# Altium PCB 04-12307_Drone_ESC.PcbDoc (part 4 of 5)
Units mm, origin at the board's own origin, x right, y up, seen from the top; angles counter-clockwise.
Board outline 55 x 33 mm, 4 copper layers (LAYER 1 (Top), LAYER 2, LAYER 3, LAYER 4 (Bottom)), stack 1.504 mm thick; 174 components, 90 nets, 407 pads, 193 vias.
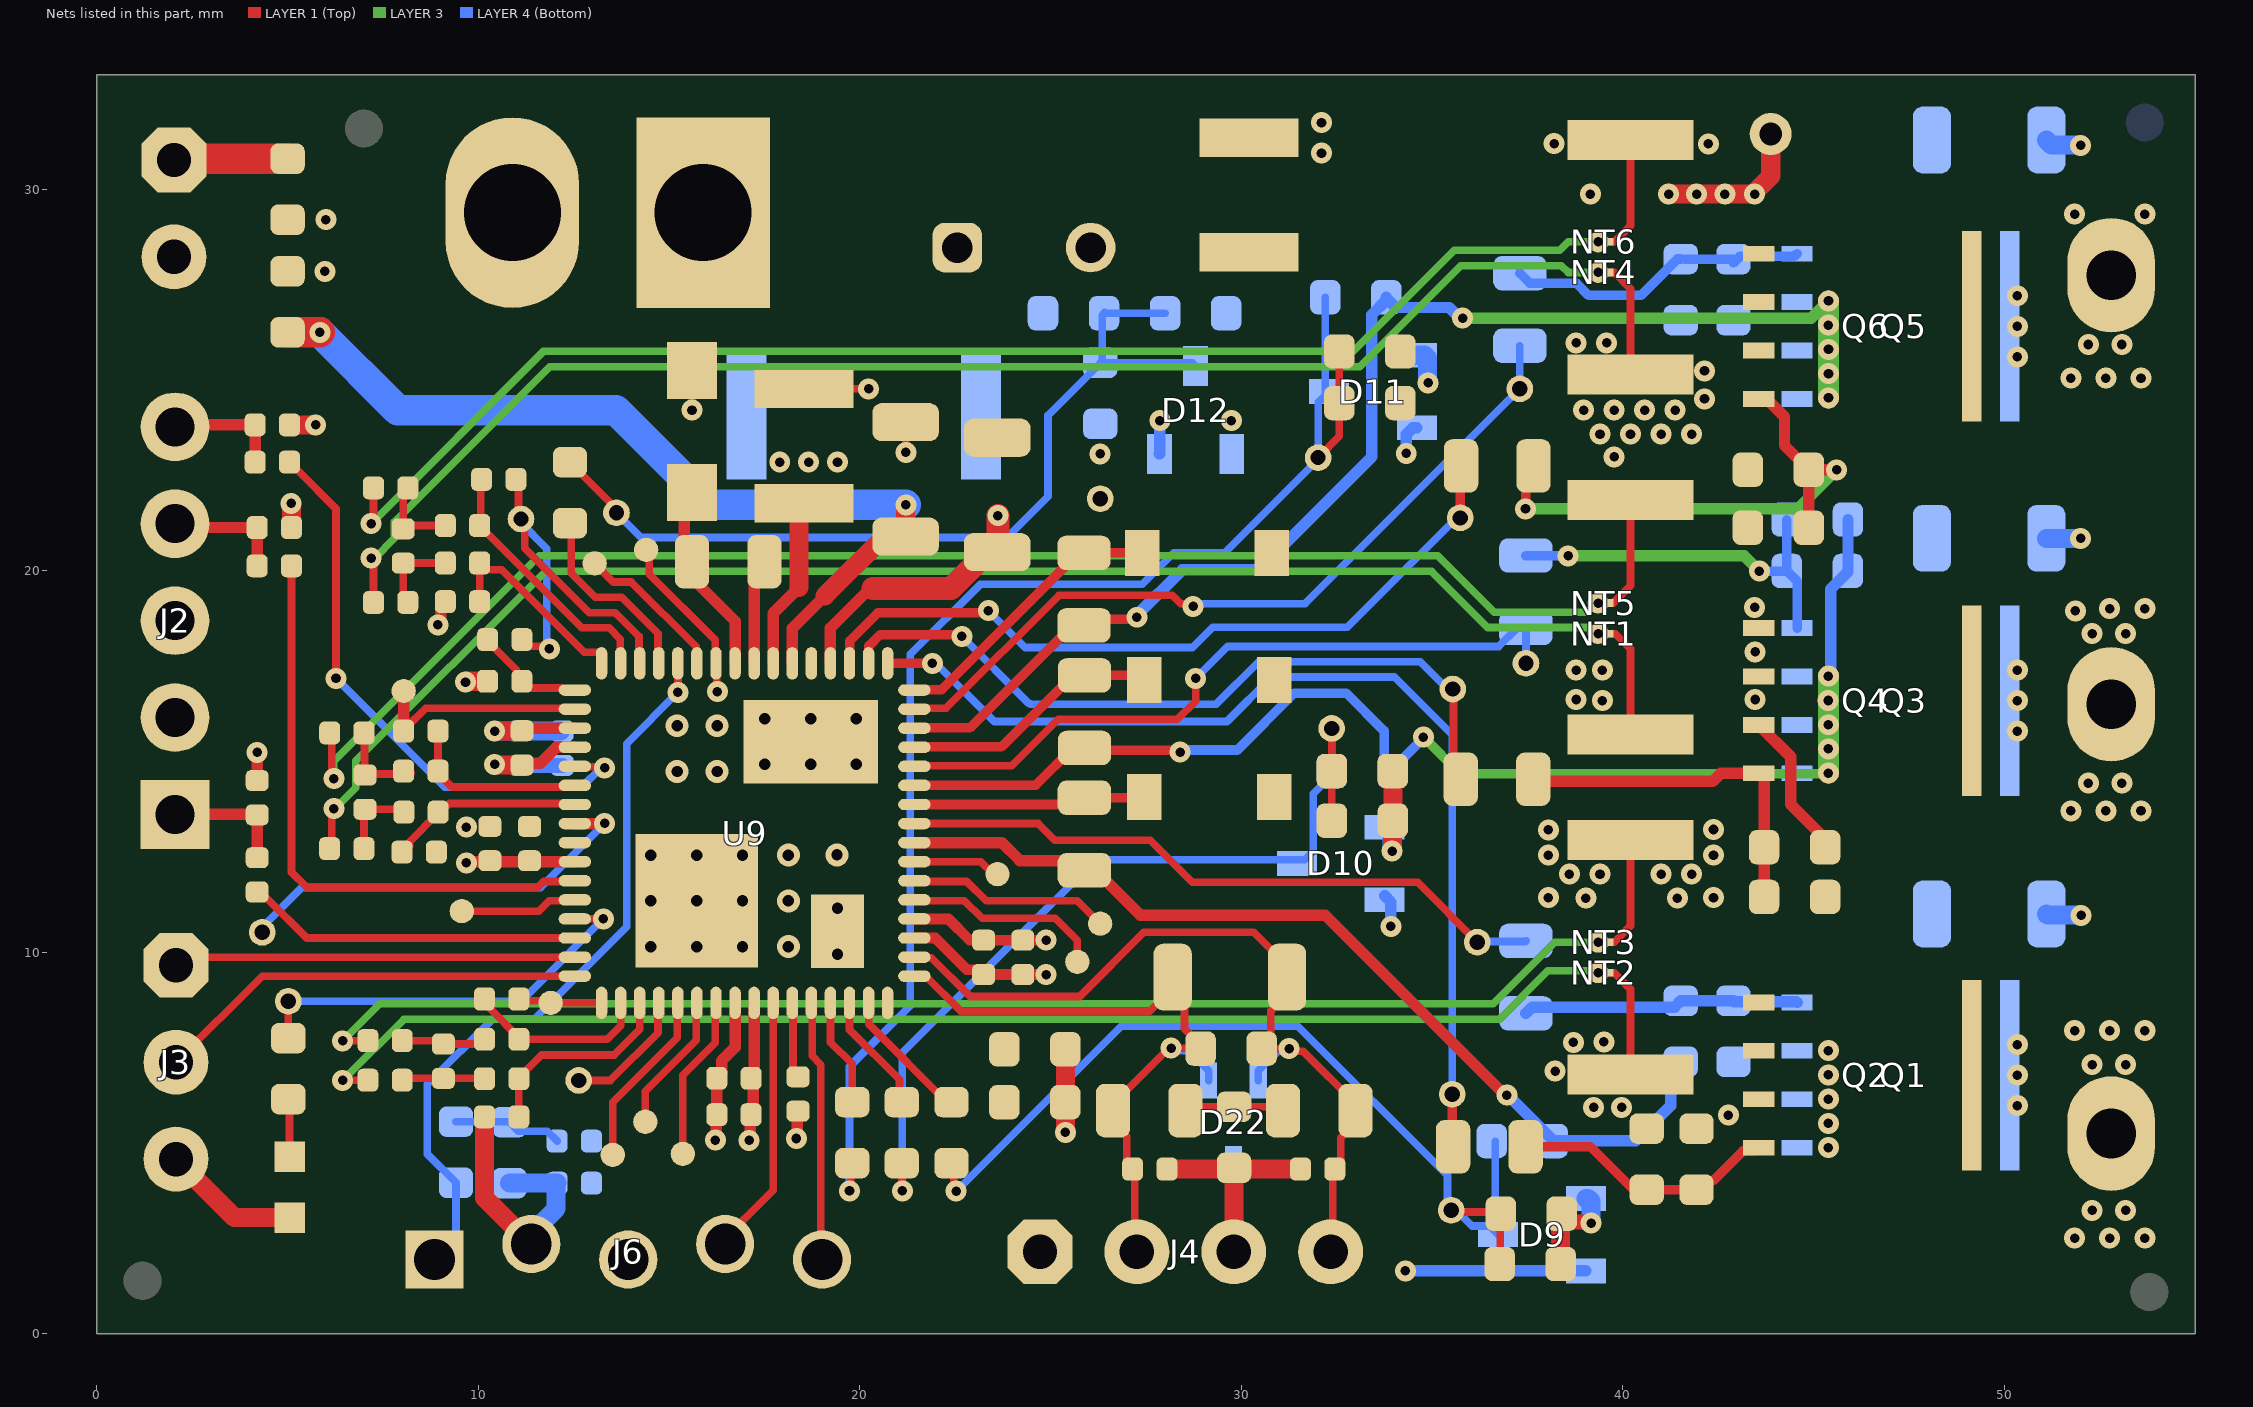
[diagram p4: the nets of this part, all layers, seen from the top]

## Via types
v1: diameter 0.55, hole 0.25, LAYER 1 (Top) to LAYER 4 (Bottom), tented both sides, 168 vias
v2: diameter 0.6, hole 0.3, LAYER 1 (Top) to LAYER 4 (Bottom), tented bottom, 25 vias

## Nets (pads, with @x,y where several pads share a name; then routed paths per layer and width w, separated by ;. In a path a pad name is that pad's centre, name@x,y a point inside that pad or via, vN(x,y) a via of type N, cw(c..) or ccw(c..) an arc to the next point about the centre after c; other vN are vias at no path point) (continued)
M\C\L\R\: (continued)
  LAYER 4 (Bottom) w0.2: J6.1@8.849,1.934 9.415,2.5 R183.2@9.415,3.956 ; R183.2@9.415,3.96 9.415,3.964 8.665,4.714 8.665,6.544 10.371,8.25 11.468,8.25 13.885,10.668 13.885,15.465 v1(15.231,16.812)
NetC1_1: C1.1 R2.2 U9.17 | length 3
  LAYER 1 (Top) w0.2: R2.2@10.241,18.198 10.241,18.152 10.99,17.404 10.99,17.257 C1.1@11.141,17.105 11.141,17.101 11.314,16.929 12.173,16.929 12.226,16.875 U9.17@12.528,16.875
NetC4_2: C4.2 J2.1 R11.1 | length 3.3
  LAYER 1 (Top) w0.3: J2.1@2.049,13.615 4.189,13.615 C4.2@4.203,13.602 R11.1@4.203,12.48
NetC5_2: C5.2 J2.4 R12.1 | length 3.2
  LAYER 1 (Top) w0.3: J2.4@2.049,21.235 2.149,21.135 C5.2@4.203,21.135 R12.1@4.202,20.131
NetC6_2: C6.2 J2.5 R1.1 | length 3.1
  LAYER 1 (Top) w0.3: J2.5@2.049,23.775 2.1,23.826 C6.2@4.15,23.826 R1.1@4.15,22.85
NetC46_1: C46.1 R58.2 R59.1 | length 2.2
  LAYER 1 (Top) w0.2: R58.2@8.15,19.172 8.031,19.291 C46.1@8.031,20.201 8.035,20.205 R59.1@9.134,20.205
NetC46_2: C46.2 R21.2 R22.1 | length 2.3
  LAYER 1 (Top) w0.2: R21.2@8.15,22.174 8.031,22.055 C46.2@8.031,21.101 8.118,21.188 R22.1@9.134,21.188
NetC51_1: C51.1 U9.8 | length 2.7
  LAYER 1 (Top) w0.3: U9.8@17.229,17.575 17.229,20.165 C51.1@17.301,20.237
NetC51_2: C51.2 D24.2 U9.9 | length 5.1
  LAYER 1 (Top) w0.3: D24.2@15.6,22.05 15.401,21.851 15.401,20.01 16.729,18.682 U9.9@16.729,17.575
NetC55_1: C55.1 R74.2 R75.1 | length 2.2
  LAYER 1 (Top) w0.2: R74.2@8.005,6.649 8.052,6.697 C55.1@9.083,6.697 10.151,6.697 R75.1@10.162,6.685
NetC55_2: C55.2 R67.2 R68.1 | length 2.2
  LAYER 1 (Top) w0.2: R67.2@8.005,7.686 8.993,7.686 C55.2@9.083,7.597 10.036,7.597 R68.1@10.162,7.723
NetC65_1: C65.1 R91.2 R92.1 | length 2.1
  LAYER 1 (Top) w0.2: R91.2@7.001,12.719 7.001,13.721 C65.1@7.029,13.75 7.974,13.75 R92.1@8.048,13.675
NetC65_2: C65.2 R83.2 R84.1 | length 2.1
  LAYER 1 (Top) w0.2: R83.2@7.004,15.752 7.016,15.739 7.016,14.662 C65.2@7.029,14.65 ; C65.2@7.254,14.675 8.216,14.675 R84.1@8.241,14.7
NetC70_2: C70.2 R99.1 R100.1 | length 2.6
  LAYER 1 (Top) w0.2: R99.1@28.537,5.85 28.638,5.951 C70.2@29.81,5.951 30.991,5.951 R100.1@31.092,5.85
NetC75_2: C75.2 D9.3 R110.2 R114.1 R119.1 VA.1 | length 24.6
  LAYER 1 (Top) w0.2: R114.1@22.4,4.475 22.463,4.413 22.463,3.801 v1(22.526,3.738) ; VA.1@35.5,3.238 35.544,3.194 36.756,3.194 R119.1@36.8,3.15 36.785,3.135 36.785,1.846 C75.2@36.769,1.831
  LAYER 4 (Bottom) w0.2: v1(22.526,3.738) 26.854,8.066 31.477,8.066 35.404,4.139 35.404,3.333 VA.1@35.5,3.238 35.635,3.238 36.048,2.825 36.506,2.825 D9.3@36.659,2.672 ; R110.2@36.659,5.052 D9.3@36.659,2.672 ; D9.3@36.731,2.6 D9.3@36.659,2.672
NetC76_2: C76.2 D11.3 R111.2 R115.1 R120.1 VC.1 | length 35.6
  LAYER 1 (Top) w0.2: v1(19.729,3.75) 19.764,3.786 19.764,4.44 R115.1@19.8,4.475 ; VC.1@32.012,22.967 32.569,23.525 C76.2@32.569,24.396 R120.1@32.569,25.75
  LAYER 4 (Bottom) w0.2: v1(19.729,3.75) 19.729,7.007 21.325,8.604 21.325,17.813 23.162,19.65 27.404,19.65 28.226,20.472 29.562,20.472 VC.1@32.012,22.922 ; VC.1@32.012,22.967 32.012,24.412 32.2,24.6 R111.2@32.2,27.171
NetC78_2: C78.2 D10.3 R112.2 R118.1 R121.1 VB.1 | length 22.8
  LAYER 1 (Top) w0.2: R118.1@21.1,4.475 21.1,3.76 v1(21.113,3.747) ; VB.1@32.366,15.668 32.369,15.664 R121.1@32.369,14.75 C78.2@32.369,13.45
  LAYER 4 (Bottom) w0.2: v1(21.113,3.747) 21.113,7.362 23.68,9.93 26.181,12.43 31.656,12.43 31.881,12.655 31.881,14.158 32.369,14.646 R112.2@32.369,14.75 ; VB.1@32.366,15.668 32.367,15.666 32.367,14.952 R112.2@32.566,14.754
NetC85_2: C85.2 D12.3 R128.2 R133.1 R137.1 VBUS.1 | length 23.4
  LAYER 1 (Top) w0.2: R133.1@12.4,22.85 12.4,22.846 13.619,21.627 VBUS.1@13.619,21.52
  LAYER 4 (Bottom) w0.2: VBUS.1@13.619,21.52 14.267,20.872 23.854,20.872 24.933,21.951 24.933,24.079 26.3,25.446 C85.2@26.3,25.45 ; R128.2@26.4,26.75 26.35,26.7 26.35,25.5 C85.2@26.3,25.45 ; R128.2@26.42,26.77 26.44,26.75 R137.1@28,26.75 ; D12.3@28.8,25.363 28.713,25.45 C85.2@26.3,25.45
NetC108_1: C108.1 NT1.2 Q4.1 Q4.2 Q4.3 R157.2 Rsh2.2 | length 6.9
  LAYER 1 (Top) w0.2: NT1.2@39.65,18.355 39.801,18.355 40.2,17.956 Rsh2.2@40.2,15.71
  LAYER 1 (Top) w0.3: Q4.3@43.564,15.96 44.4,15.124 44.4,13.875 45.3,12.975 C108.1@45.3,12.753
  other v1: 39.464,16.595 38.774,16.627 43.464,16.627 38.774,17.395 39.464,17.395 43.464,17.877 43.455,19.044
NetC109_1: C109.1 NT3.2 NT4.2 NT5.2 Q6.1 Q6.2 Q6.3 R159.2 Rsh1.1 Rsh2.1 Rsh3.2 | length 8.9
  LAYER 1 (Top) w0.2: NT3.2@39.65,10.267 39.771,10.267 40.2,10.696 Rsh1.1@40.2,12.942 ; NT5.2@39.65,19.154 39.741,19.154 40.2,19.614 Rsh2.1@40.2,21.86 ; NT4.2@39.65,27.821 39.771,27.821 40.2,27.392 Rsh3.2@40.2,25.146
  other v1: 38.048,11.432 39.031,11.421 41.431,11.421 42.375,11.432 38.6,12.049 39.4,12.049 41,12.049 41.8,12.049 38.048,12.545 42.375,12.545 38.044,13.207 42.375,13.219 39.769,22.987 39.4,23.585 40.2,23.585 41,23.585 41.8,23.585 38.969,24.213 39.769,24.213 40.569,24.213 41.369,24.213 42.139,24.505 42.139,25.239 38.774,25.972 39.571,25.975
NetC110_1: C110.1 NT2.2 Q2.1 Q2.2 Q2.3 R158.2 Rsh1.2 | length 3
  LAYER 1 (Top) w0.2: NT2.2@39.65,9.467 39.771,9.467 40.2,9.038 Rsh1.2@40.2,6.792
  other v1: 42.764,5.734 39.235,5.938 39.969,5.938 38.222,6.888 38.705,7.64 39.5,7.651
NetC111_2: C111.2 D17.2 U9.64 | length 7.5
  LAYER 1 (Top) w0.25: U9.64@21.429,16.875 21.438,16.885 22.146,16.885 25.361,20.1 25.361,20.152 25.679,20.469 D17.2@27.4,20.469
NetC112_2: C112.2 D15.2 U9.58 | length 7.1
  LAYER 1 (Top) w0.25: U9.58@21.429,13.875 25.708,13.875 C112.2@25.885,14.052 27.133,14.052 27.137,14.055 D15.2@27.137,14.089 ; D15.2@27.441,13.785 D15.2@27.288,13.939 ; D15.2@27.137,14.089 D15.2@27.458,13.768 ; D15.2@27.137,14.089 D15.2@27.288,13.939 ; D15.2@27.288,13.939 D15.2@27.458,13.768 ; D15.2@27.458,13.768 27.458,13.672 D15.2@27.458,13.768
NetC113_2: C113.2 D16.2 U9.61 | length 6.9
  LAYER 1 (Top) w0.25: U9.61@21.429,15.375 21.438,15.385 23.71,15.385 25.584,17.259 27.386,17.259 D16.2@27.499,17.146
NetC118_2: C118.2 R181.2 R183.1 | length 2.9
  LAYER 4 (Bottom) w0.2: R183.1@9.415,5.56 9.421,5.554 10.807,5.554 11.051,5.31 11.809,5.31 12.065,5.055 C118.2@12.065,5.05
NetHSA_1: HSA.1 R161.1 U9.57 | length 17.3
  LAYER 1 (Top) w0.2: U9.57@21.429,13.375 24.675,13.375 25.108,12.942 27.606,12.942 28.715,11.833 34.619,11.833 HSA.1@36.184,10.267
  LAYER 4 (Bottom) w0.2: HSA.1@36.184,10.267 36.201,10.284 37.443,10.284 R161.1@37.459,10.3
NetHSB_1: HSB.1 R160.1 U9.60 | length 18.8
  LAYER 1 (Top) w0.2: U9.60@21.429,14.875 21.448,14.894 23.982,14.894 25.196,16.109 28.322,16.109 28.8,16.587 v1(28.8,17.179)
  LAYER 4 (Bottom) w0.2: v1(28.8,17.179) 29.639,18.018 36.742,18.018 37.224,18.5 R160.1@37.459,18.5 HSB.1@37.459,17.575
NetHSC_1: HSC.1 R171.1 U9.63 | length 20.7
  LAYER 1 (Top) w0.2: U9.63@21.429,16.375 21.448,16.394 22.257,16.394 25.22,19.358 28.192,19.358 28.414,19.136 28.666,19.136 v1(28.733,19.069)
  LAYER 4 (Bottom) w0.2: v1(28.733,19.069) 28.8,19.136 31.666,19.136 HSC.1@37.3,24.77 R171.1@37.3,25.9
NetLD1_1: LD1.1 R187.2 | length 1.5
  LAYER 1 (Top) w0.2: R187.2@5.019,6.15 5.05,6.119 LD1.1@5.05,4.647
NetLSA_1: LSA.1 R168.1 U9.1 | length 27.3
  LAYER 1 (Top) w0.25: U9.1@20.729,17.575 v1(21.9,17.575) ; LSA.1@35.525,6.28 35.525,4.929 R168.1@35.55,4.904
  LAYER 4 (Bottom) w0.2: v1(21.9,17.575) 21.995,17.575 23.52,16.05 29.623,16.05 30.791,17.218 34.007,17.218 35.525,15.7 LSA.1@35.525,6.28
NetLSB_1: LSB.1 R167.1 U9.2 | length 19.7
  LAYER 1 (Top) w0.2: LSB.1@35.544,16.9 35.559,16.885 35.559,14.546 R167.1@35.55,14.537
  LAYER 1 (Top) w0.25: U9.2@20.229,17.575 20.238,17.585 20.238,18.031 20.532,18.325 22.627,18.325 v1(22.673,18.279)
  LAYER 4 (Bottom) w0.2: v1(22.673,18.279) 24.394,16.558 ccw(c24.535,16.7) 24.415,16.54 ccw(c24.535,16.7) 24.535,16.5 29.335,16.5 30.453,17.618 34.691,17.618 35.395,16.914 LSB.1@35.53,16.914
NetLSC_1: LSC.1 R173.1 U9.3 | length 20
  LAYER 1 (Top) w0.25: U9.3@19.729,17.575 19.738,17.585 19.738,18.168 20.468,18.898 23.31,18.898 v1(23.368,18.955) ; LSC.1@35.737,21.481 35.737,22.728 R173.1@35.759,22.75
  LAYER 4 (Bottom) w0.2: v1(23.368,18.955) 24.334,17.989 28.715,17.989 29.245,18.519 32.775,18.519 LSC.1@35.737,21.481
NetRSVD1_1: RSVD1.1 U9.39 | length 4.3
  LAYER 1 (Top) w0.2: RSVD1.1@15.359,4.718 15.359,6.778 16.209,7.628 16.209,8.656 U9.39@16.229,8.675
NetRSVD2_1: RSVD2.1 U9.38 | length 3.7
  LAYER 1 (Top) w0.2: RSVD2.1@14.376,5.559 14.376,6.361 15.709,7.694 15.709,8.656 U9.38@15.729,8.675
NetTP12_1: TP12.1 U9.10 | length 4.5
  LAYER 1 (Top) w0.2: TP12.1@14.4,20.55 14.483,20.467 14.483,19.912 16.209,18.186 16.209,17.594 16.246,17.557 16.246,16.853 v1(16.264,16.835)
NetTP13_1: TP13.1 U9.53 | length 5.3
  LAYER 1 (Top) w0.2: U9.53@21.429,11.375 21.448,11.356 22.74,11.356 23.203,10.892 25.119,10.892 25.7,10.311 TP13.1@25.7,9.75
NetTP14_1: TP14.1 U9.54 | length 5.3
  LAYER 1 (Top) w0.2: U9.54@21.429,11.875 21.448,11.856 22.805,11.856 23.311,11.35 25.7,11.35 TP14.1@26.3,10.75
NetTP19_1: TP19.1 U9.11 | length 4
  LAYER 1 (Top) w0.2: TP19.1@13.049,20.197 13.541,19.705 14.01,19.705 15.709,18.006 15.709,17.594 U9.11@15.729,17.575
NetU9_55: U9.55 WAKE.1 | length 2.3
  LAYER 1 (Top) w0.2: U9.55@21.429,12.375 23.164,12.375 23.49,12.049 WAKE.1@23.608,12.049
OA1IN+: R59.2 R60.1 U9.16 | length 5.4
  LAYER 1 (Top) w0.2: R60.1@10.034,19.194 R59.2@10.034,20.205 10.034,20.2 10.206,20.028 10.615,20.028 12.774,17.869 13.182,17.869 13.229,17.823 U9.16@13.229,17.575
OA1IN-: R22.2 R52.1 U9.15 | length 6.8
  LAYER 1 (Top) w0.2: R52.1@10.084,22.397 10.059,22.373 10.059,21.213 R22.2@10.034,21.188 10.034,21.184 12.713,18.505 13.427,18.505 13.723,18.209 U9.15@13.723,17.581
OA2IN+: R75.2 R76.1 U9.35 | length 5.4
  LAYER 1 (Top) w0.2: R76.1@11.062,5.685 R75.2@11.062,6.685 ; R75.2@11.062,6.71 11.662,7.31 13.558,7.31 14.229,7.98 U9.35@14.229,8.675
OA2IN-: R68.2 R69.1 U9.34 | length 4.8
  LAYER 1 (Top) w0.2: R69.1@10.159,8.777 10.311,8.625 10.311,8.519 11.062,7.768 R68.2@11.062,7.723 13.38,7.723 13.729,8.071 U9.34@13.729,8.675
OA3IN+: R92.2 R93.1 U9.23 | length 5.1
  LAYER 1 (Top) w0.2: R93.1@8.048,12.628 8.2,12.779 8.2,12.902 8.928,13.63 8.948,13.63 8.948,13.68 9.12,13.852 9.193,13.852 9.24,13.899 12.202,13.899 12.226,13.875 U9.23@12.528,13.875
OA3IN-: R84.2 R85.1 U9.22 | length 4.8
  LAYER 1 (Top) w0.2: R85.1@8.941,15.75 8.941,14.7 9.306,14.334 12.141,14.334 12.164,14.356 12.509,14.356 U9.22@12.528,14.375
PGC: J6.5 U9.44 | length 6.7
  LAYER 1 (Top) w0.2: U9.44@18.729,8.675 18.748,8.656 18.748,7.286 18.979,7.055 18.979,2.307 J6.5@18.809,2.137
PGD: J6.4 U9.42 | length 7
  LAYER 1 (Top) w0.2: J6.4@16.269,2.305 17.731,3.768 17.731,8.672 U9.42@17.729,8.675
PHASE_A: C106.1 C112.1 PHASE_A.1 Q1.1 Q1.2 Q1.3 Q2.5 R110.1 R154.2 U9.56 | length 24.7
  LAYER 1 (Top) w0.3: U9.56@21.429,12.875 23.726,12.875 24.196,12.405 25.631,12.405 C112.1@25.885,12.152 26.175,12.152 27.352,10.975 32.194,10.975 36.91,6.259 v1(36.959,6.259)
  LAYER 4 (Bottom) w0.3: v1(36.959,6.259) 36.981,6.259 38.188,5.052 38.259,5.052 38.27,5.063 40.332,5.063 41.25,5.981 41.25,6.882 41.496,7.128 R154.2@41.519,7.128
  other v1: 51.84,2.508 52.76,2.508 53.68,2.508 52.3,3.238 53.18,3.238 45.385,4.879 45.385,5.515 45.385,6.149 45.385,6.789 52.3,7.053 53.18,7.053 45.385,7.423 51.84,7.948 52.76,7.948 53.68,7.948
PHASE_B: C105.1 C113.1 PHASE_B.1 Q3.1 Q3.2 Q3.3 Q4.5 R112.1 R156.2 U9.59 | length 34.1
  LAYER 1 (Top) w0.25: U9.59@21.429,14.375 21.438,14.385 24.61,14.385 25.584,15.359 C113.1@25.889,15.359 25.945,15.302 28.34,15.302 v1(28.396,15.246)
  LAYER 3 w0.25: v1(34.769,15.642) 35.731,14.681 45.371,14.681 v1(45.385,14.695)
  LAYER 3 w0.55: v1(45.385,14.695) v1(45.385,15.331) v1(45.385,15.965) 45.385,16.601 v1(45.385,17.239)
  LAYER 4 (Bottom) w0.25: v1(28.396,15.246) 28.453,15.303 29.897,15.303 31.386,16.793 32.749,16.793 33.741,15.801 33.741,14.979 R112.1@33.969,14.75 33.969,14.821 34.769,15.621 v1(34.769,15.642)
  LAYER 4 (Bottom) w0.3: v1(45.385,17.239) 45.385,17.306 45.45,17.371 45.45,19.523 45.9,19.973 C105.1@45.9,19.999 R156.2@45.9,21.343
  other v1: 51.74,13.705 52.66,13.705 53.58,13.705 52.2,14.436 53.08,14.436 45.381,16.601 52.3,18.355 53.18,18.355 51.859,18.948 52.76,19.011 53.68,19.011
PHASE_C: C107.1 C111.1 PHASE_C.1 Q5.1 Q5.2 Q5.3 Q6.5 R111.1 R153.2 U9.62 | length 33.9
  LAYER 1 (Top) w0.25: U9.62@21.429,15.875 21.438,15.885 22.886,15.885 25.57,18.569 C111.1@25.874,18.569 26.03,18.725 27.203,18.725 v1(27.26,18.783)
  LAYER 3 w0.3: v1(35.8,26.621) 44.933,26.621 v1(45.39,27.078)
  LAYER 3 w0.55: v1(45.39,24.534) v1(45.39,25.169) v1(45.39,25.804) v1(45.39,27.078)
  LAYER 4 (Bottom) w0.3: v1(27.26,18.783) 27.26,18.833 28.449,20.022 30.456,20.022 33.422,22.988 33.422,26.716 33.8,27.094 R111.1@33.8,27.171 ; R111.1@33.8,27.148 34.046,26.902 35.451,26.902 35.732,26.621 v1(35.8,26.621)
  other v1: 51.74,25.052 52.66,25.052 53.58,25.052 52.2,25.932 53.08,25.932 45.386,26.439 51.84,29.35 53.68,29.35
SHUNT_IA_N: NT3.1 R67.1 | length 34.6
  LAYER 1 (Top) w0.2: v1(6.444,7.679) 6.452,7.686 R67.1@7.105,7.686
  LAYER 3 w0.2: v1(6.444,7.679) 7.416,8.65 36.6,8.65 38.217,10.267 NT3.1@39.35,10.267
SHUNT_IA_P: NT2.1 R74.1 | length 34.8
  LAYER 1 (Top) w0.2: v1(6.444,6.642) 6.451,6.649 R74.1@7.105,6.649
  LAYER 3 w0.2: v1(6.444,6.642) 8.052,8.25 36.766,8.25 38.032,9.516 39.301,9.516 NT2.1@39.35,9.467
SHUNT_IB_N: NT5.1 R83.1 | length 37.8
  LAYER 1 (Top) w0.2: R83.1@6.104,15.752 6.158,15.698 6.158,14.604 v1(6.213,14.55)
  LAYER 3 w0.2: v1(6.213,14.55) 6.213,15.008 11.595,20.391 35.149,20.391 36.627,18.913 39.058,18.913 39.3,19.155 NT5.1@39.35,19.155
SHUNT_IB_P: NT1.1 R91.1 | length 37.9
  LAYER 1 (Top) w0.2: R91.1@6.101,12.719 6.157,12.775 6.157,13.709 v1(6.213,13.765)
  LAYER 3 w0.2: v1(6.213,13.765) 6.241,13.765 6.788,14.312 6.788,15.018 11.761,19.991 34.983,19.991 36.461,18.513 39.097,18.513 39.255,18.355 NT1.1@39.35,18.355
SHUNT_IBUS_N: NT6.1 R21.1 | length 36.2
  LAYER 1 (Top) w0.2: v1(7.191,21.235) 7.25,21.294 R21.1@7.25,22.174
  LAYER 3 w0.2: v1(7.191,21.235) 11.707,25.751 32.936,25.751 35.584,28.4 38.345,28.4 38.566,28.621 NT6.1@39.35,28.621
SHUNT_IBUS_P: NT4.1 R58.1 | length 36.8
  LAYER 1 (Top) w0.2: v1(7.191,20.335) 7.25,20.275 R58.1@7.25,19.172
  LAYER 3 w0.2: v1(7.191,20.335) 7.284,20.335 7.8,20.85 7.8,21.278 11.873,25.351 33.101,25.351 35.75,28 38.387,28 38.566,27.821 NT4.1@39.35,27.821
TEMP: TEMP.1 U9.24 | length 11
  LAYER 1 (Top) w0.3: U9.24@12.528,13.375 13.305,13.375 v1(13.31,13.38)
  LAYER 4 (Bottom) w0.2: TEMP.1@4.334,10.523 4.334,10.657 5.377,11.7 11.63,11.7 v1(13.31,13.38)
UART_PWM: R1.2 U9.21 | length 15.4
  LAYER 1 (Top) w0.2: R1.2@5.05,22.85 5.05,22.845 5.245,22.65 5.25,22.65 6.269,21.631 v1(6.269,17.179) ; U9.21@12.528,14.875 12.536,14.867 13.28,14.867 v1(13.31,14.837)
  LAYER 4 (Bottom) w0.2: v1(6.269,17.179) 9.123,14.325 12.704,14.325 13.216,14.837 v1(13.31,14.837)
V_BUS: R133.2 U9.13 | length 5
  LAYER 1 (Top) w0.2: R133.2@12.4,21.25 12.432,21.218 12.432,19.941 13.068,19.305 13.758,19.305 14.709,18.354 14.709,17.594 U9.13@14.729,17.575
VA: R114.2 U9.47 | length 3.6
  LAYER 1 (Top) w0.2: U9.47@20.229,8.675 20.229,8.122 22.275,6.075 R114.2@22.4,6.075
VB: R118.2 U9.46 | length 3.2
  LAYER 1 (Top) w0.2: U9.46@19.729,8.675 19.729,7.97 21.04,6.658 21.04,6.135 R118.2@21.1,6.075
VBOOT: C48.1 D15.1 D16.1 D17.1 U9.4 VBOOT.1 | length 7.2
  LAYER 1 (Top) w0.3: U9.4@19.229,17.575 19.229,18.501 20.267,19.539 20.338,19.539
  LAYER 1 (Top) w0.6: 20.338,19.539 22.394,19.539 23.026,20.171 23.026,20.29 23.226,20.49 C48.1@23.601,20.49 ; C48.1@23.605,20.49 23.616,20.5 v1(23.616,21.447)
VC: R115.2 U9.45 | length 2.8
  LAYER 1 (Top) w0.2: U9.45@19.229,8.675 19.229,7.647 19.8,7.075 R115.2@19.8,6.075
VDC: C3.1 C15.2 C100.1 C102.1 C103.1 HVDD.1 J1.1 Q1.5 Q3.5 Q5.5 R9.1 R128.1 | length 4
  LAYER 1 (Top) w0.5: v1(41.2,29.875) v1(42.675,29.875) v1(43.455,29.875) ; v1@43.455,29.925 43.875,30.345 HVDD.1@43.875,31.45
  other v1: 50.341,5.98 50.341,6.78 50.341,7.58 50.341,15.795 50.341,16.595 50.341,17.395 50.341,25.61 50.341,26.41 50.341,27.21 39.15,29.875 41.931,29.875 32.1,30.95 32.1,31.75
VDD: C39.2 C53.2 C54.2 C56.2 C57.2 C58.2 C60.2 C61.2 C62.2 C63.2 D9.2 D10.2 D11.2 D12.2 J2.2 J6.2 R19.1 R54.2 R60.2 R76.2 R93.2 R181.1 U9.19 U9.25 U9.41 U9.52 | length 26.2
  LAYER 1 (Top) w0.28: U9.52@21.429,10.875 22.325,10.875 22.883,10.317 C61.2@23.244,10.317 v1(24.881,10.317)
  LAYER 1 (Top) w0.3: v1(8.941,18.583) 8.941,18.65 9.009,18.719 9.009,19.069 R60.2@9.134,19.194 ; C58.2@11.136,15.799 11.212,15.875 U9.19@12.528,15.875 ; v1(17.099,5.072) 17.125,5.098 17.125,5.669 17.2,5.744 17.2,6.8 17.229,6.829 U9.41@17.229,8.675
  LAYER 1 (Top) w0.5: R76.2@10.162,5.685 10.162,3.566 J6.2@11.389,2.34 ; v1(10.426,15.799) C58.2@11.136,15.799
  LAYER 4 (Bottom) w0.3: D12.2@27.85,23.063 27.855,23.069 v1@27.855,23.944 ; D10.2@33.756,11.48 33.92,11.317 v1(33.92,10.678) ; v1(34.3,1.65) D9.2@39.031,1.65 ; v1(34.322,23.08) 34.322,23.575 34.497,23.75 D11.2@34.6,23.75
  LAYER 4 (Bottom) w0.5: v1(10.426,15.799) 11.099,15.799 C56.2@12.15,15.8 ; R181.1@10.813,3.949 C39.2@12.065,3.949 12.04,3.924 12.04,3.282 11.389,2.63 J6.2@11.389,2.353
  other v1: 9.683,13.281 27.861,23.937 5.978,27.847 6.005,29.204
VREG: C49.1 R54.1 U9.6 | length 23.8
  LAYER 1 (Top) w0.3: U9.6@18.229,17.575 18.229,18.49 19.084,19.345
  LAYER 1 (Top) w0.5: 19.084,19.345 20.636,20.897 C49.1@21.2,20.897 21.2,21.718 v1(21.208,21.726)
  LAYER 1 (Top) w0.8: R54.1@5,26.25 v1(5.844,26.25)
  LAYER 4 (Bottom) w0.8: v1(5.844,26.25) 7.881,24.213 13.601,24.213 16.088,21.726 v1(21.208,21.726)
pads on no net: FD1.1 FD2.1 FD3.1 FD4.1 FD5.1 FD6.1 NT1.0 NT2.0 NT3.0 NT4.0 NT5.0 NT6.0